# EAGLE board Basic Circuit_Electronics 101_EP.01 (EAGLE 9.7.0)

Size 70.48 x 45.87 mm. Coordinates in mm from the lower left corner, seen from the top.
Outline: 0,0 70.48,0 70.48,45.87 0,45.87 0,0
Copper layers (1*16): Top 0.035mm / dielectric 1.5mm / Bottom 0.035mm
Design rules "default": minimum track width 6mil, minimum drill 0.35mm, track to track 6mil, track to pad 6mil, pad to pad 6mil, via to via 6mil, smd to smd 6mil, copper to edge 40mil, drill to drill 6mil, minimum pad ring 10mil, minimum via ring 8mil, stop-mask expansion 4mil, vias tented up to drill 0mil, thermal gap 10mil

## Footprints (pad centres in the part's own frame; a part is rotated, then mirrored left to right if it is on the bottom)
BATTERY-GENERIC = drill 1.118 pad 3.15 octagon: + 2.54,0; - -2.54,0
RESAD1016W63L850D250B = drill 0.83 pad 1.43: 1 -5.08,0; 2 5.08,0

## Placement (x,y rotation side)
BAT1  9V  [BATTERY-GENERIC]  8.26,37.61 180 top
R1  100  [RESAD1016W63L850D250B]  64.15,8.97 90 top

## Library data of the parts
BAT1 R1 = Tinkercad

## Nets
BAT1-: BAT1.- R1.1

## Tracks (layer width: path | path; a pad name or v marks a point on that pad's centre or on a via)
BAT1-  (1 unrouted)